# EAGLE board OOBD-Tiger_4L_18µmbeta (EAGLE 7.6.0)
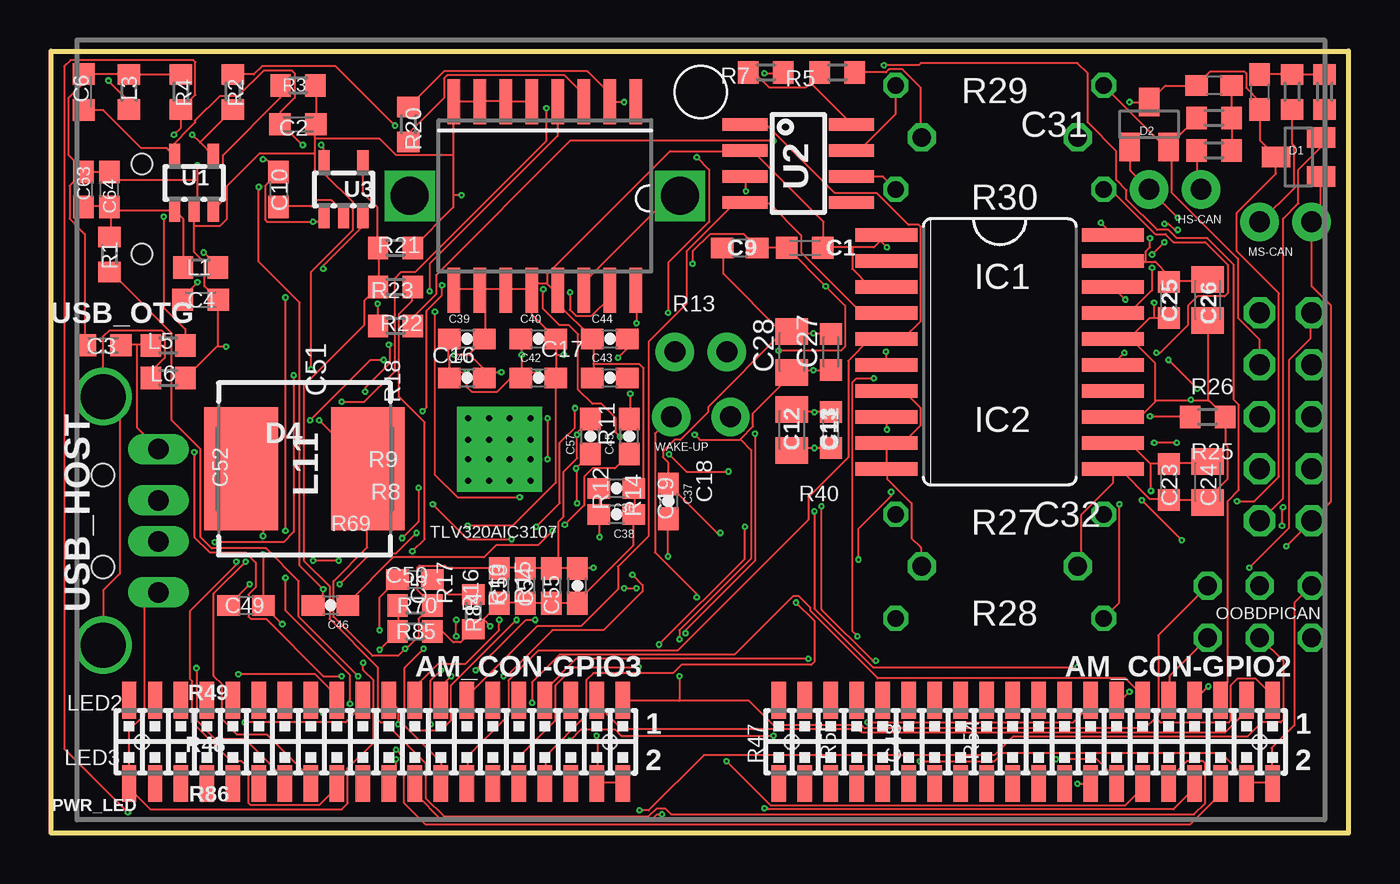
[diagram p0: board, top side]
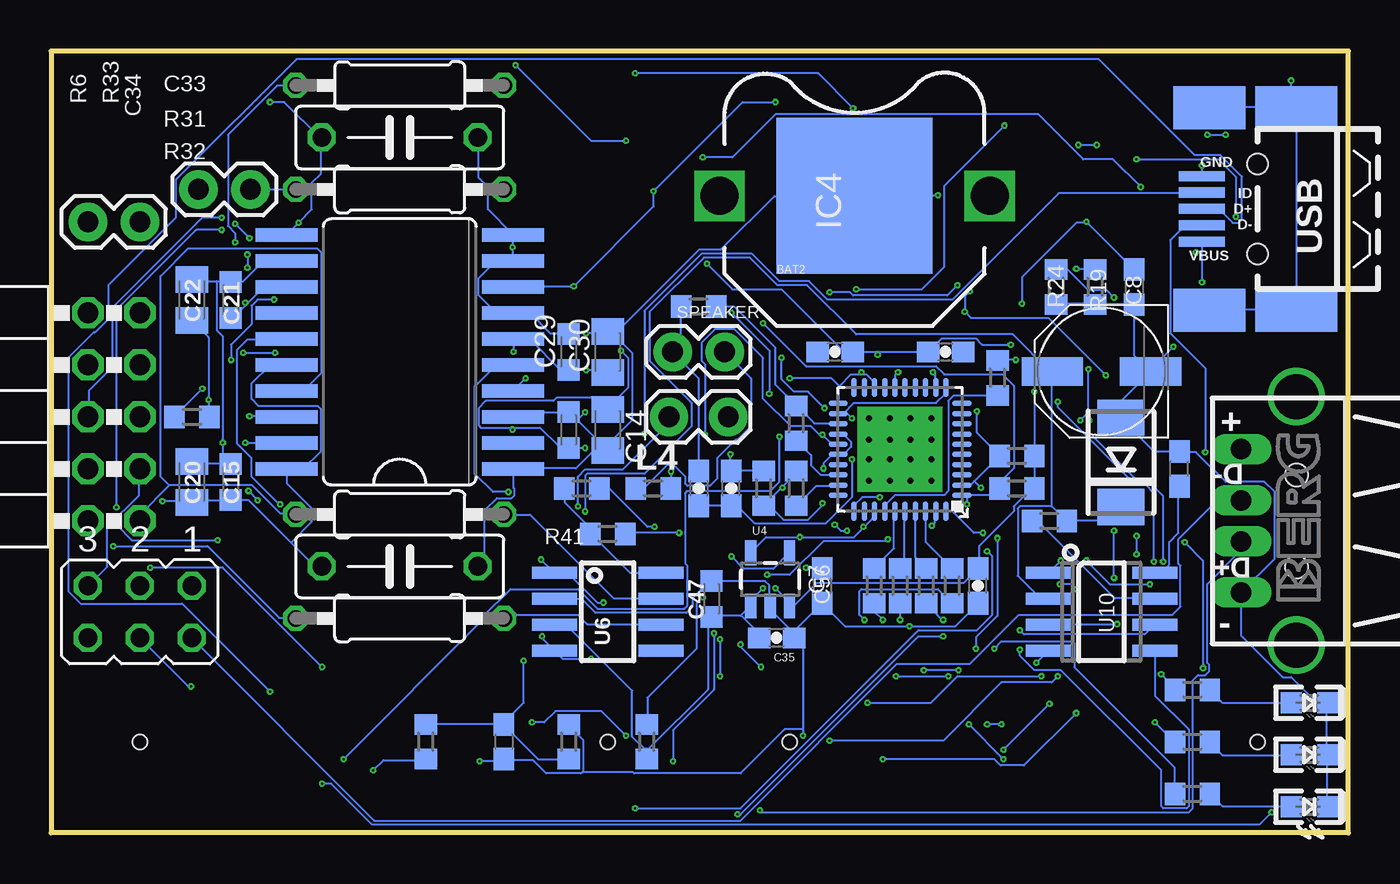
[diagram p1: board, bottom side, seen from below]

Size 63.39 x 38.18 mm. Coordinates in mm from the lower left corner, seen from the top.
Outline: 0,0 63.39,0 63.39,38.18 0,38.18 0,0
Copper layers (1+2*3+16): Top 0.018mm / dielectric 0.36mm / Route2 0.018mm / dielectric 0.71mm / Route3 0.018mm / dielectric 0.36mm / Bottom 0.018mm
Design rules "Multi-CB_4L_100um-Tracks_OL35um-IL18um": minimum track width 0.1mm, minimum drill 0.1mm, track to track 0.1mm, track to pad 0.1mm, pad to pad 0.1mm, via to via 0.1mm, smd to smd 0mil, copper to edge 0.2mm, drill to drill 0.2mm, minimum pad ring 0.1mm, minimum via ring 0.1mm, stop-mask expansion 2mil, vias tented up to drill 0.45mm, thermal gap 0.2mm
Net classes: 2 lan_sh: clearance 0.762 mm
tRestrict: area 42.3,10.5 to 50.5,37.3
bRestrict: area 42.4,10.5 to 50.4,37.4

## Footprints (pad centres in the part's own frame; a part is rotated, then mirrored left to right if it is on the bottom)
OOBD-TIGER-AM3352-SOM = smd 0.7 x 1.8: 3-1 27.94,-13.208; 3-2 27.94,-17.272; 3-3 26.67,-13.208; 3-4 26.67,-17.272; 3-5 25.4,-13.208; 3-6 25.4,-17.272; 3-7 24.13,-13.208; 3-8 24.13,-17.272; 3-9 22.86,-13.208; 3-10 22.86,-17.272; 3-11 21.59,-13.208; 3-12 21.59,-17.272; 3-13 20.32,-13.208; 3-14 20.32,-17.272; 3-15 19.05,-13.208; 3-16 19.05,-17.272; 3-17 17.78,-13.208; 3-18 17.78,-17.272; 3-19 16.51,-13.208; 3-20 16.51,-17.272; 3-21 15.24,-13.208; 3-22 15.24,-17.272; 3-23 13.97,-13.208; 3-24 13.97,-17.272; 3-25 12.7,-13.208; 3-26 12.7,-17.272; 3-27 11.43,-13.208; 3-28 11.43,-17.272; 3-29 10.16,-13.208; 3-30 10.16,-17.272; 3-31 8.89,-13.208; 3-32 8.89,-17.272; 3-33 7.62,-13.208; 3-34 7.62,-17.272; 3-35 6.35,-13.208; 3-36 6.35,-17.272; 3-37 5.08,-13.208; 3-38 5.08,-17.272; 3-39 3.81,-13.208; 3-40 3.81,-17.272; 4-1 -3.81,-13.208; 4-2 -3.81,-17.272; 4-3 -5.08,-13.208; 4-4 -5.08,-17.272; 4-5 -6.35,-13.208; 4-6 -6.35,-17.272; 4-7 -7.62,-13.208; 4-8 -7.62,-17.272; 4-9 -8.89,-13.208; 4-10 -8.89,-17.272; 4-11 -10.16,-13.208; 4-12 -10.16,-17.272; 4-13 -11.43,-13.208; 4-14 -11.43,-17.272; 4-15 -12.7,-13.208; 4-16 -12.7,-17.272; 4-17 -13.97,-13.208; 4-18 -13.97,-17.272; 4-19 -15.24,-13.208; 4-20 -15.24,-17.272; 4-21 -16.51,-13.208; 4-22 -16.51,-17.272; 4-23 -17.78,-13.208; 4-24 -17.78,-17.272; 4-25 -19.05,-13.208; 4-26 -19.05,-17.272; 4-27 -20.32,-13.208; 4-28 -20.32,-17.272; 4-29 -21.59,-13.208; 4-30 -21.59,-17.272; 4-31 -22.86,-13.208; 4-32 -22.86,-17.272; 4-33 -24.13,-13.208; 4-34 -24.13,-17.272; 4-35 -25.4,-13.208; 4-36 -25.4,-17.272; 4-37 -26.67,-13.208; 4-38 -26.67,-17.272; 4-39 -27.94,-13.208; 4-40 -27.94,-17.272 | hole 0.7: 27.305,-15.24; 4.445,-15.24; -4.445,-15.24; -27.305,-15.24
BATTCON_12MM_PTH = smd 7.62 x 7.62: GND 0,0 | drill 1.854 square: VCC@1 -6.604,0; VCC@2 6.604,0
C0603K = smd 1.05 x 1.08: 1 -0.875,0; 2 0.875,0
0603-CAP = smd 1.1 x 1: 1 -0.85,0; 2 0.85,0
C0603 = smd 1.1 x 1: 1 -0.85,0; 2 0.85,0
C0805K = smd 1.3 x 1.6: 1 -1,0; 2 1,0
C075-032X103 = drill 0.914 octagon: 1 -3.81,0; 2 3.81,0
PANASONIC_D = smd 3 x 1.4: + 2.4,0; - -2.4,0
SOT23 = smd 1 x 1.4: 1 -0.95,-1.1; 2 0.95,-1.1; 3 0,1.1
DO214AA = smd 1.778 x 2.286: A 2.177,0; C -2.177,0
1X02 = drill 1.016 pad 1.88: 1 0,0; 2 2.54,0
SO20W = smd 0.66 x 3.032: 1 -5.715,-5.529; 2 -4.445,-5.529; 3 -3.175,-5.529; 4 -1.905,-5.529; 5 -0.635,-5.529; 6 0.635,-5.529; 7 1.905,-5.529; 8 3.175,-5.529; 9 4.445,-5.529; 10 5.715,-5.529; 11 5.715,5.529; 12 4.445,5.529; 13 3.175,5.529; 14 1.905,5.529; 15 0.635,5.529; 16 -0.635,5.529; 17 -1.905,5.529; 18 -3.175,5.529; 19 -4.445,5.529; 20 -5.715,5.529
SOIC-16W = smd 0.6 x 2.2: 1 -4.445,-4.6; 2 -3.175,-4.6; 3 -1.905,-4.6; 4 -0.635,-4.6; 5 0.635,-4.6; 6 1.905,-4.6; 7 3.175,-4.6; 8 4.445,-4.6; 9 4.445,4.6; 10 3.175,4.6; 11 1.905,4.6; 12 0.635,4.6; 13 -0.635,4.6; 14 -1.905,4.6; 15 -3.175,4.6; 16 -4.445,4.6
L0603 = smd 1 x 1.1: 1 -0.85,0; 2 0.85,0
8X8MM_3131 = smd 3.6 x 6: 1 -3.1,0; 2 3.1,0
LED_0603 = smd 1.016 x 1.016: A 0.889,0; C -0.889,0
2X05/90 = drill 1.016 octagon: 1 -5.08,-6.35; 2 -5.08,-3.81; 3 -2.54,-6.35; 4 -2.54,-3.81; 5 0,-6.35; 6 0,-3.81; 7 2.54,-6.35; 8 2.54,-3.81; 9 5.08,-6.35; 10 5.08,-3.81
JP3Q = drill 0.914 octagon: 1 -2.54,-1.27; 2 -2.54,1.27; 3 0,-1.27; 4 0,1.27; 5 2.54,-1.27; 6 2.54,1.27
LED-0603 = smd 1.016 x 1.016: A 0.889,0; C -0.889,0
R0603 = smd 1 x 1.1: 1 -0.85,0; 2 0.85,0
0207/10 = drill 0.813 octagon: 1 -5.08,0; 2 5.08,0
QFN40-6X6 = smd 0.95 x 0.28: 1 -3.025,2.25; 2 -3.025,1.75; 3 -3.025,1.25; 4 -3.025,0.75; 5 -3.025,0.25; 6 -3.025,-0.25; 7 -3.025,-0.75; 8 -3.025,-1.25; 9 -3.025,-1.75; 10 -3.025,-2.25; 21 3.025,-2.25; 22 3.025,-1.75; 23 3.025,-1.25; 24 3.025,-0.75; 25 3.025,-0.25; 26 3.025,0.25; 27 3.025,0.75; 28 3.025,1.25; 29 3.025,1.75; 30 3.025,2.25 | smd 0.28 x 0.95: 11 -2.25,-3.025; 12 -1.75,-3.025; 13 -1.25,-3.025; 14 -0.75,-3.025; 15 -0.25,-3.025; 16 0.25,-3.025; 17 0.75,-3.025; 18 1.25,-3.025; 19 1.75,-3.025; 20 2.25,-3.025; 31 2.25,3.025; 32 1.75,3.025; 33 1.25,3.025; 34 0.75,3.025; 35 0.25,3.025; 36 -0.25,3.025; 37 -0.75,3.025; 38 -1.25,3.025; 39 -1.75,3.025; 40 -2.25,3.025 | drill 0.3 pad 1.1 square: EP@1 -1.525,1.525; EP@2 -0.5,1.525; EP@3 0.5,1.525; EP@4 1.525,1.525; EP@5 -1.525,0.475; EP@6 -0.5,0.475; EP@7 0.5,0.475; EP@8 1.525,0.475; EP@9 -1.525,-0.475; EP@10 -0.5,-0.475; EP@11 0.5,-0.475; EP@12 1.525,-0.475; EP@13 -1.525,-1.525; EP@14 -0.5,-1.525; EP@15 0.5,-1.525; EP@16 1.525,-1.525
SOT23-5 = smd 1.2 x 0.55: 1 1.3,-0.95; 2 1.3,0; 3 1.3,0.95; 4 -1.3,0.95; 5 -1.3,-0.95
SO-08 = smd 0.6 x 2.2: 1 -1.905,-2.6; 2 -0.635,-2.6; 3 0.635,-2.6; 4 1.905,-2.6; 5 1.905,2.6; 6 0.635,2.6; 7 -0.635,2.6; 8 -1.905,2.6
SOT23-5' = smd 0.55 x 1.2: 1 -0.95,-1.3; 2 0,-1.3; 3 0.95,-1.3; 4 0.95,1.3; 5 -0.95,1.3
SOIC8 = smd 0.6 x 2.2: 1 -1.905,-2.6; 2 -0.635,-2.6; 3 0.635,-2.6; 4 1.905,-2.6; 5 1.905,2.6; 6 0.635,2.6; 7 -0.635,2.6; 8 -1.905,2.6
USB_PN87520_DEV_PTH = drill 1 long: 1 3.5,2.71; 2 1,2.71; 3 -1,2.71; 4 -3.5,2.71 | drill 2.2: P$1 6.07,0; P$2 -6.07,0 | hole 1.1: -2.25,0; 2.25,0
USB_MINI_9PIN = smd 2.25 x 0.5: D+ 2.706,0; D- 2.706,0.8; GND 2.706,-1.6; ID 2.706,-0.8; VBUS 2.706,1.6 | smd 4 x 2.1: GND1 -1.9,4.95; GND3 -1.9,-4.95 | smd 3.5 x 2.1: GND2 2.35,4.95; GND4 2.35,-4.95 | hole 1: 0,2.2; 0,-2.2
1X02_LOCK = drill 1.016 pad 1.88: 1 -0.178,0; 2 2.718,0

## Placement (x,y rotation side)
AM3352-SOM-EVB-PLATFORM  4XGPH127SMT-02X20(PA-V16X-2X20-LF)  [OOBD-TIGER-AM3352-SOM]  31.75,19.68 0 top
BAT2  3,6V  [BATTCON_12MM_PTH]  24.13,31.11 0 bottom
C1  100nF  [C0603K]  36.83,28.57 0 top
C2  100nF  [C0603K]  12.06,34.61 0 top
C3  100nF  [C0603K]  2.54,23.81 180 top
C4  100nF  [C0603K]  7.3,26.04 0 top
C5  0.1µF  [0603-CAP]  18.1,12.06 90 bottom
C6  100nF  [C0603K]  1.59,36.2 90 top
C7  22µF  [0603-CAP]  25.72,12.06 90 top
C8  22uF/6.3V  [C0603]  10.48,26.67 270 bottom
C9  1uF  [C0603]  33.66,28.57 0 top
C10  22uF/6.3V  [C0603]  11.11,31.43 270 top
C11  100nF  [C0603K]  38.1,19.68 90 top
C12  10µF  [C0805K]  36.2,19.68 90 top
C13  100nF  [C0603K]  38.1,19.68 90 bottom
C14  10µF  [C0805K]  36.2,19.68 270 bottom
C15  100nF  [C0603K]  54.61,17.14 270 bottom
C16  0.1µF  [0603-CAP]  19.68,23.5 0 bottom
C17  10µF  [0603-CAP]  25.08,23.5 180 bottom
C18  0,01µF  [0603-CAP]  31.75,16.83 270 bottom
C19  0,01µF  [0603-CAP]  30.16,16.83 90 bottom
C20  10µF  [C0805K]  56.52,17.14 270 bottom
C21  100nF  [C0603K]  54.61,26.04 270 bottom
C22  10µF  [C0805K]  56.52,26.04 270 bottom
C23  100nF  [C0603K]  54.61,17.14 270 top
C24  10µF  [C0805K]  56.52,17.14 270 top
C25  100nF  [C0603K]  54.61,26.04 270 top
C26  10µF  [C0805K]  56.52,26.04 270 top
C27  100nF  [C0603K]  38.1,23.5 90 top
C28  10µF  [C0805K]  36.2,23.5 90 top
C29  100nF  [C0603K]  38.1,23.5 90 bottom
C30  10µF  [C0805K]  36.2,23.5 90 bottom
C31  NA (AY2221K29Y5SS63L7)  [C075-032X103]  46.35,33.97 0 bottom
C32  NA (AY2221K29Y5SS63L7)  [C075-032X103]  46.35,13.02 0 bottom
C33  NA(10nF)  [C0603]  56.83,36.51 180 top
C34  NA(10nF)  [C0603]  59.05,36.2 270 top
C35  1µf  [0603-CAP]  27.94,9.53 180 bottom
C36  2.2µf  [0603-CAP]  27.62,16.83 180 top
C37  NA (47pF)  [0603-CAP]  30.16,16.19 270 top
C38  1.0µF  [0603-CAP]  27.62,15.56 180 top
C39  0.1µF  [0603-CAP]  20.32,24.13 0 top
C40  10µF  [0603-CAP]  23.81,24.13 0 top
C41  0.1µF  [0603-CAP]  20.32,22.23 0 top
C42  10µF  [0603-CAP]  23.81,22.23 0 top
C43  10µF  [0603-CAP]  27.3,22.23 0 top
C44  1.0µF  [0603-CAP]  27.3,24.13 0 top
C45  0.1µF  [0603-CAP]  28.26,19.37 90 top
C46  10µF  [0603-CAP]  13.65,11.11 180 top
C47  100nF  [C0603K]  31.11,11.43 90 bottom
C48  100nF  [C0603]  41.27,4.45 270 bottom
C49  10nF  [C0603]  9.53,11.11 0 top
C50  3.3nF  [C0603]  17.78,12.38 0 top
C51  470uF/25V/LOWESR/105C  [PANASONIC_D]  12.06,22.54 180 bottom
C52  100nF  [C0603]  8.26,17.78 90 bottom
C53  22uF/6.3V  [C0603]  21.91,12.06 270 top
C54  22uF/6.3V  [C0603]  23.18,12.06 270 top
C55  22uF/6.3V  [C0603]  24.45,12.06 270 top
C56  22uF/6.3V  [C0603]  25.72,12.06 270 bottom
C57  0.1µF  [0603-CAP]  26.35,19.37 90 top
C63  22uF/6.3V  [C0603]  1.59,31.43 90 top
C64  22uF/6.3V  [C0603]  2.86,31.43 90 top
D1  PESD1CAN  [SOT23]  60.96,33.02 90 top
D2  PESD1CAN  [SOT23]  53.66,34.61 0 top
D4  SMBJ16A  [DO214AA]  11.11,18.1 90 bottom
HS-CAN  OPEN  [1X02]  56.2,31.43 0 bottom
IC1  ADM3053M  [SO20W]  46.35,23.5 270 top
IC2  ADM3053M  [SO20W]  46.35,23.5 90 bottom
IC4  DS3231  [SOIC-16W]  24.13,31.11 180 top
L1  FB0805/600R/2A  [L0603]  7.3,27.62 180 top
L3  FB0805/600R/200mA(201209-601)  [L0603]  3.81,36.2 270 top
L4  FB0805/600R/2A  [L0603]  33.97,16.83 0 bottom
L5  FB0805/600R/2A  [L0603]  5.71,23.81 180 top
L6  FB0805/600R/2A  [L0603]  5.71,22.23 180 top
L11  10uH/3.15A/20%  [8X8MM_3131]  12.38,17.78 0 top
LED2  LED/Red/0603  [LED_0603]  1.91,6.35 180 bottom
LED3  LED/Yellow/0603  [LED_0603]  1.91,3.81 180 bottom
MS-CAN  OPEN  [1X02]  59.05,29.84 180 bottom
OOBD2-CONNECTOR  In-Car Diagnostic  [2X05/90]  65.41,20.32 90 bottom
OOBDPICAN  Bridge to PICAN  [JP3Q]  59.05,10.79 180 bottom
PWR_LED  LED/Red/0603  [LED-0603]  1.91,1.27 180 bottom
R1  2.2k/1%  [R0603]  2.86,28.26 90 top
R2  NA  [R0603]  8.89,36.2 90 top
R3  13k/1%  [R0603]  12.06,36.51 180 top
R4  10k  [R0603]  6.35,36.2 270 top
R5  10k  [R0603]  38.42,37.15 0 top
R6  60R  [R0603]  62.23,36.2 270 top
R7  NA  [R0603]  34.92,37.15 0 top
R8  10K  [R0603]  16.19,16.83 0 bottom
R9  10K  [R0603]  16.19,18.41 0 bottom
R10  0  [R0603]  21.91,12.06 90 bottom
R11  0  [R0603]  26.99,20 90 bottom
R12  0  [R0603]  26.99,16.83 90 bottom
R13  0  [R0603]  31.75,25.72 180 bottom
R14  0  [R0603]  28.57,16.83 90 bottom
R15  0  [R0603]  23.18,12.06 90 bottom
R16  0  [R0603]  20.64,12.06 90 bottom
R17  0  [R0603]  19.37,12.06 90 bottom
R18  0  [R0603]  17.14,22.23 270 bottom
R19  6k8k/1%  [R0603]  12.38,26.67 90 bottom
R20  10k  [R0603]  17.46,34.61 90 top
R21  10k  [R0603]  16.83,28.57 180 top
R22  2.2k/1%  [R0603]  16.83,24.77 180 top
R23  NA  [R0603]  16.83,26.67 0 top
R24  10k/1%  [R0603]  14.29,26.67 90 bottom
R25  8k2  [R0603]  56.52,20.32 180 top
R26  8k2  [R0603]  56.52,20.32 180 bottom
R27  0R  [0207/10]  46.35,15.56 0 bottom
R28  0R  [0207/10]  46.35,10.48 0 bottom
R29  0R  [0207/10]  46.35,36.51 180 bottom
R30  0R  [0207/10]  46.35,31.43 0 bottom
R31  60R  [R0603]  56.83,34.92 180 top
R32  60R  [R0603]  56.83,33.34 180 top
R33  60R  [R0603]  60.64,36.2 270 top
R40  NA  [R0603]  37.47,16.83 0 bottom
R41  10k  [R0603]  36.2,14.61 0 bottom
R47  2.2k/1%  [R0603]  34.29,4.45 270 bottom
R48  2.2k/1%  [R0603]  7.62,4.45 0 bottom
R49  2.2k/1%  [R0603]  7.62,6.99 0 bottom
R54  49.9R/1%  [R0603]  45.09,4.45 90 bottom
R55  NA  [R0603]  38.1,4.45 90 bottom
R69  10k  [R0603]  14.61,15.24 180 bottom
R70  4.99k/1%  [R0603]  17.78,11.11 0 top
R84  2.2k/1%  [R0603]  20.64,10.79 270 top
R85  1.05k/1%  [R0603]  17.78,9.84 0 top
R86  2.2k/1%  [R0603]  7.62,1.91 0 bottom
SPEAKER  LS1  [1X02]  30.48,23.5 180 bottom
TLV320AIC3107  Audio-Amplifier  [QFN40-6X6]  21.91,18.73 180 bottom
U1  SY6280  [SOT23-5]  6.99,31.75 270 top
U2  SN65HVD230(SO8)  [SO-08]  36.51,32.7 270 top
U3  SY6280  [SOT23-5]  14.29,31.43 270 top
U4  TLV70215  [SOT23-5']  28.26,12.38 0 bottom
U6  SN65HVD230(SO8)  [SO-08]  36.2,10.79 270 bottom
U10  MP1482DS  [SOIC8]  12.06,10.79 270 bottom
USB_HOST  USB_A_VERTICAL  [USB_PN87520_DEV_PTH]  2.54,15.24 90 bottom
USB_OTG  USB-OTG  [USB_MINI_9PIN]  4.45,30.48 180 bottom
WAKE-UP  Open  [1X02_LOCK]  30.48,20.32 180 bottom

## Library data of the parts
AM3352-SOM-EVB-PLATFORM = OOBDtiger-Connector
BAT2 HS-CAN MS-CAN SPEAKER WAKE-UP = SparkFun
C1-C4 C6 C8-C15 C20-C32 C47-C50 C52-C56 C63 C64 L1 L3-L6 R1-R5 R7 R19-R30 R40 R41 R47-R49 R54 R55 R69 R70 R84-R86 = rcl
C5 C7 C18 C19 C37 C38 C43-C46 C57 = SparkFun-Passives; MANEX: 123-0001115
C16 C17 C35 C36 C39-C42 = SparkFun-Passives; MANEX: 123-0001032
C33 C34 R6 R10-R18 R31-R33 = resistor
C51 = SparkFun-Capacitors; PROD_ID: CAP-10547
D1 D2 = Industrialberry
D4 L11 = OLIMEX_DISCRET
IC1 IC2 = ADM3053
IC4 = DS3231_industrialberry
LED2 LED3 PWR_LED = DOUBLE-SIDE
OOBD2-CONNECTOR = pinhead
OOBDPICAN = jumper
R8 R9 = resistor; MANEX: 110-0002014
TLV320AIC3107 = TLV320AIC3107
U1 U3 U10 = OLIMEX_IC
U2 U6 = arm
U4 = SparkFun-PowerIC
USB_HOST USB_OTG = OLIMEX_CONNECTORS

## Nets
3V3 [PWR]: AM3352-SOM-EVB-PLATFORM.3-3 AM3352-SOM-EVB-PLATFORM.4-3
+3V3: C1.1 C5.2 C9.2 C11.1 C12.1 C13.1 C14.1 C16.1 C17.1 C35.2 C39.1 C40.1 C41.1 C42.1 C43.2 C47.1 IC1.8 IC2.8 IC4.2 R8.2 R9.2 R20.2 R47.2 TLV320AIC3107.12 TLV320AIC3107.13 TLV320AIC3107.18 TLV320AIC3107.21 U2.3 U4.1 U4.3 U6.3
+5V: AM3352-SOM-EVB-PLATFORM.3-1 AM3352-SOM-EVB-PLATFORM.4-1 C2.1 C6.1 C7.2 C27.1 C28.1 C29.1 C30.1 C53.1 C54.1 C55.1 C56.1 C57.2 IC1.6 IC2.6 L11.2 OOBDPICAN.1 R70.2 R86.1 TLV320AIC3107.25 U1.5 U3.5
+5V_OTG_PWR: C4.1 L1.1 USB_OTG.VBUS
+12V: C51.+ D4.C OOBD2-CONNECTOR.10 R69.1 U10.2
AGND: C18.2 C19.1 TLV320AIC3107.11 TLV320AIC3107.22
AUD_BCLK: AM3352-SOM-EVB-PLATFORM.4-19 R15.1
AUD_DIN: AM3352-SOM-EVB-PLATFORM.4-18 R16.1
AUD_DOUT: AM3352-SOM-EVB-PLATFORM.4-20 R17.1
AUD_MCLK: AM3352-SOM-EVB-PLATFORM.4-24 R18.1
AUD_WCLK: AM3352-SOM-EVB-PLATFORM.4-17 R10.1
CAN0_H: D1.2 IC2.17 OOBD2-CONNECTOR.1 R6.2 R27.1
CAN0_L: D1.1 IC2.15 MS-CAN.2 OOBD2-CONNECTOR.2 R28.1
CAN1_H: D2.2 IC1.17 OOBD2-CONNECTOR.7 R29.2 R31.2
CAN1_L: D2.1 HS-CAN.2 IC1.15 OOBD2-CONNECTOR.6 R30.1
DCAN0_RX: AM3352-SOM-EVB-PLATFORM.4-7 IC2.4 U6.4
DCAN0_TX: AM3352-SOM-EVB-PLATFORM.4-8 IC2.5 U6.1
DCAN1_RX: AM3352-SOM-EVB-PLATFORM.4-13 IC1.4 U2.4
DCAN1_TX: AM3352-SOM-EVB-PLATFORM.4-14 IC1.5 U2.1
DVDD: C36.2 C38.2 C44.2 TLV320AIC3107.33 U4.5
EXT_WAKEUP: AM3352-SOM-EVB-PLATFORM.3-20 R54.1
GND [PWR]: AM3352-SOM-EVB-PLATFORM.3-2 AM3352-SOM-EVB-PLATFORM.3-4 AM3352-SOM-EVB-PLATFORM.4-2 AM3352-SOM-EVB-PLATFORM.4-4 AM3352-SOM-EVB-PLATFORM.4-40 BAT2.GND C1.2 C2.2 C3.2 C4.2 C5.1 C6.2 C7.1 C8.2 C9.1 C10.2 C11.2 C12.2 C13.2 C14.2 C16.2 C17.2 C27.2 C28.2 C29.2 C30.2 C31.2 C32.2 C35.1 C36.1 C37.1 C38.1 C39.2 C40.2 C41.2 C42.2 C43.1 C44.1 C47.2 C48.2 C51.- C52.2 C53.2 C54.2 C55.2 C56.2 C57.1 C63.2 C64.2 D4.A IC1.1 IC1.3 IC1.7 IC1.9 IC1.10 IC2.1 IC2.3 IC2.7 IC2.9 IC2.10 IC4.5 IC4.6 IC4.7 IC4.8 IC4.9 IC4.10 IC4.11 IC4.12 IC4.13 L3.1 L6.1 LED2.C LED3.C OOBD2-CONNECTOR.3 OOBDPICAN.5 PWR_LED.C R3.1 R4.1 R5.2 R12.2 R14.1 R19.1 R21.1 R24.1 R41.2 R55.2 R84.2 R85.2 TLV320AIC3107.16 TLV320AIC3107.24 TLV320AIC3107.26 TLV320AIC3107.39 U1.2 U2.2 U3.2 U4.2 U6.2 U10.4 USB_HOST.4 USB_OTG.GND
GND1 [PWR]: C45.1 C46.1
GNDA [PWR]: C15.2 C20.2 C21.2 C22.2 C23.2 C24.2 C25.2 C26.2 C31.1 C32.1 C33.2 C34.2 D1.3 D2.3 IC1.11 IC1.13 IC1.16 IC1.20 IC2.11 IC2.13 IC2.16 IC2.20 R25.1 R26.1
HS-CAN_RS: AM3352-SOM-EVB-PLATFORM.4-26 R7.2
I2C0-SCL: AM3352-SOM-EVB-PLATFORM.4-15 IC4.16 R8.1 TLV320AIC3107.1
I2C0-SDA: AM3352-SOM-EVB-PLATFORM.4-16 IC4.15 R9.1 TLV320AIC3107.2
LED1: AM3352-SOM-EVB-PLATFORM.4-21 R48.1
LED2: AM3352-SOM-EVB-PLATFORM.4-23 R49.1
MS-CAN_RS: AM3352-SOM-EVB-PLATFORM.4-25 R40.2
N$1: LED2.A R49.2
N$2: C33.1 R31.1 R32.1
N$3: R19.2 U3.3
N$4: C52.1 U10.8
N$5: R5.1 R7.1 U2.8
N$6: R69.2 U10.7
N$7: C49.1 U10.1
N$8: C49.2 L11.1 U10.3
N$9: C50.1 U10.6
N$10: C34.1 R6.1 R33.1
N$11: C50.2 R84.1
N$12: C37.2 U4.4
N$13: C8.1 C10.1 L5.1 R22.2 U3.1
N$14: C19.2 L4.2 R14.2
N$15: C18.1 R13.2 SPEAKER.2
N$16: L4.1 SPEAKER.1
N$18: R11.2 R13.1 TLV320AIC3107.23
N$19: R11.1 TLV320AIC3107.28
N$20: R12.1 TLV320AIC3107.29
N$21: C45.2 C46.2 TLV320AIC3107.40
N$22: R17.2 TLV320AIC3107.38
N$23: R16.2 TLV320AIC3107.37
N$24: R15.2 TLV320AIC3107.35
N$25: R10.2 TLV320AIC3107.36
N$26: R18.2 TLV320AIC3107.34
N$27: IC4.3 R20.1
N$28: C3.1 L5.2 USB_HOST.1
N$29: L6.2 USB_HOST.P$1 USB_HOST.P$2
N$30: HS-CAN.1 R32.2
N$31: C23.1 C24.1 C25.1 C26.1 IC1.12 IC1.19
N$32: MS-CAN.1 R33.2
N$33: IC2.18 R25.2
N$40: R27.2 U6.7
N$41: R30.2 U2.6
N$42: R28.2 U6.6
N$43: R47.1 WAKE-UP.1
N$44: C48.1 R54.2 R55.1 WAKE-UP.2
N$45: R29.1 U2.7
N$50: C15.1 C20.1 C21.1 C22.1 IC2.12 IC2.19
N$52: IC1.18 R26.2
N$62: R70.1 R85.1 U10.5
N$80: R40.1 R41.1 U6.8
N$99: R3.2 U1.3
N$100: C63.1 C64.1 L1.2 R1.2 U1.1
N$129: PWR_LED.A R86.2
N$231: LED3.A R48.2
N$266: L3.2 USB_OTG.GND1 USB_OTG.GND2 USB_OTG.GND3 USB_OTG.GND4
SYS_RESETN: AM3352-SOM-EVB-PLATFORM.4-28 IC4.4 TLV320AIC3107.31
USB0_CE: AM3352-SOM-EVB-PLATFORM.3-14 R2.2
USB0_DM: AM3352-SOM-EVB-PLATFORM.3-15 USB_OTG.D-
USB0_DP: AM3352-SOM-EVB-PLATFORM.3-13 USB_OTG.D+
USB0_DRV: AM3352-SOM-EVB-PLATFORM.3-16 R2.1 R4.2 U1.4
USB0_ID: AM3352-SOM-EVB-PLATFORM.3-12 USB_OTG.ID
USB0_VBUS: AM3352-SOM-EVB-PLATFORM.3-11 R1.1
USB1_CE: AM3352-SOM-EVB-PLATFORM.3-8 R23.2
USB1_DM: AM3352-SOM-EVB-PLATFORM.3-9 OOBDPICAN.2 USB_HOST.2
USB1_DP: AM3352-SOM-EVB-PLATFORM.3-7 OOBDPICAN.4 USB_HOST.3
USB1_DRV: AM3352-SOM-EVB-PLATFORM.3-10 R21.2 R23.1 U3.4
USB1_ID: AM3352-SOM-EVB-PLATFORM.3-6 R24.2
USB1_VBUS: AM3352-SOM-EVB-PLATFORM.3-5 R22.1
VBAT: BAT2.VCC@1 IC4.14

## Tracks (layer width: path | path; a pad name or v marks a point on that pad's centre or on a via)
3V3
  Top 0.1: AM3352-SOM-EVB-PLATFORM.4-3 26.7,6.45 26.7,6.25 27.9,5.05 39.5,5.05 39.65,4.9 57.35,4.9 58.4,5.95 58.4,6.45 AM3352-SOM-EVB-PLATFORM.3-3
+3V3  (via drill 0.1)
  Top 0.1: v28,11.95 v28.6,11.95 | R20.2 17.5,35.5 19.2,37.2 26.2,37.2 27.3,36.1 27.3,35.75 IC4.2 27.35,35.7 v28,35.7 | v27.3,22.2 28.15,22.2 C43.2 | 23,22.5 v23,23.35 23,24.1 C40.1 | 23,22.5 23,22.25 C42.1 | 19.45,22.5 19.45,23.15 19.4,23.2 19.4,24.05 19.45,24.1 C39.1 | 19.45,22.5 19.45,22.25 C41.1 19.45,22.5 | 19.45,22.5 v20.3,22.5 20.3,21.8 20.55,21.55 21.8,21.55 22.45,22.2 22.95,22.2 C42.1 | 23,22.5 v23.8,22.5 | 23,22.5 C42.1 | C13.1 v37.3,18.8 36.3,18.8 36.2,18.7 C12.1 | v40.85,19.7 40.85,20.3 IC1.8 | v33.95,31.35 33.95,32.05 U2.3 | v35.55,23.55 38.6,23.55 38.8,23.75 38.8,25.75 v37.85,26.7 36,28.55 C1.1 35.95,28.6 34.55,28.6 C9.2 34.5,28.6 33.85,29.25 32.2,29.25 31.35,28.4 v31.35,27.8 | v15.35,21.55 15.35,21.75 16.55,22.95 16.55,23.8 v16.5,23.85
  Bottom 0.1: 29.68,10.62 29.25,11.05 U4.1 29.2,11.1 29.2,11.35 v28.6,11.95 | 29.68,10.62 29.7,10.6 31.1,10.6 C47.1 31.15,10.55 31.3,10.4 31.3,7 34.23,4.08 | 34.23,4.08 34.25,4.05 34.25,3.6 R47.2 | 29.68,10.62 28.8,9.75 28.8,9.55 C35.2 | U6.3 38.75,10.15 38.2,10.15 35,6.95 35,4.7 34.4,4.1 34.25,4.1 34.23,4.08 | v28,11.95 27.3,11.25 27.3,11.15 U4.3 27.3,11.1 27.1,11.1 26,12.2 18.8,12.2 C5.2 18.05,12.95 18.05,14 16.35,15.7 16.35,15.95 15.45,16.85 15.4,16.85 R8.2 15.35,16.85 R9.2 15.35,18.45 v15.35,21.55 | 23.8,22.4 24.3,22.4 24.88,21.82 | 23.8,22.4 23.55,22.4 23.2,22.05 23.2,21.8 TLV320AIC3107.18 | 24.88,21.82 24.9,21.8 24.9,21 TLV320AIC3107.21 | v27.3,22.2 25.25,22.2 24.88,21.82 | 23,23.5 24.2,23.5 C17.1 24.25,23.5 24.65,23.5 27.7,26.55 30.1,26.55 v31.35,27.8 | 23,23.5 C16.1 20.5,23.5 19.85,24.15 18.2,24.15 17.9,23.85 v16.5,23.85 | TLV320AIC3107.13 20.2,21.75 TLV320AIC3107.12 20.2,21.8 20.2,22.4 v20.3,22.5 | v23,23.35 23,23.5 | v23.8,22.5 23.8,22.4 | 40.85,19.8 42.4,19.8 42.5,19.9 42.5,20.75 42.15,21.1 38.85,21.1 38.7,21.25 36.75,21.25 36.2,20.7 C14.1 36.2,20.75 35.2,21.75 35.2,23.2 v35.55,23.55 | 40.85,19.8 39.5,19.8 38.55,18.85 38.1,18.85 C13.1 v37.3,18.8 | 40.85,19.8 v40.85,19.7 | IC2.8 40.8,26.7 v37.85,26.7 33.95,30.6 v33.95,31.35 29.6,35.7 v28,35.7
+5V  (via drill 0.1)
  Top 0.1: 30.7,6.45 34.1,6.45 35.3,5.25 39.6,5.25 39.75,5.1 53.45,5.1 53.98,5.62 | 30.7,6.45 27.95,6.45 AM3352-SOM-EVB-PLATFORM.4-1 | 53.98,5.62 54.1,5.75 54.1,9.65 OOBDPICAN.1 | 53.98,5.62 54.2,5.4 57.55,5.4 57.65,5.5 57.65,7.2 58,7.55 58.85,7.55 59.65,6.75 59.65,6.5 AM3352-SOM-EVB-PLATFORM.3-1 | C29.1 38.1,22.6 v37.25,22.6 36.3,22.6 C30.1 36.15,22.45 36.15,22.35 34.3,20.5 34.3,19.85 33.67,19.23 | v40.8,23.5 40.8,22.9 IC1.6 | C57.2 26.35,20.2 25.7,19.55 v25.7,19.45 25.7,18.3 25.05,17.65 25.05,15.45 24.8,15.2 24.8,12.95 | v26.5,12.95 25.75,12.95 C7.2 25.7,12.95 24.8,12.95 | C55.1 24.4,12.95 23.2,12.95 C54.1 23.15,12.95 21.95,12.95 C53.1 21.9,12.95 19.35,12.95 19.25,13.05 18,13.05 17.9,12.95 17.9,11.85 18.6,11.15 R70.2 18.6,11.1 17.95,10.45 17.95,9.6 17.45,9.1 17.4,9.1 v17.3,9 16.95,8.65 15.7,8.65 13.8,10.55 13.8,12.3 15.45,13.95 15.45,17.75 L11.2 15.45,17.8 v13.1,20.15 | 24.8,12.95 24.45,12.95 C55.1 | 24.8,12.95 C55.1 | 33.67,19.23 33.65,19.2 31.7,19.2 v31.45,19.45 | 5.72,33.38 6,33.1 U1.5 | 5.72,33.38 5.65,33.45 4.4,33.45 2.55,35.3 1.6,35.3 C6.1 | 5.72,33.38 7.05,34.7 7.05,34.8 8.25,36 9.15,36 10.4,37.25 11.75,37.25 11.9,37.1 11.9,35.9 11.2,35.2 11.2,34.65 C2.1 11.25,34.65 v12.3,33.6 | v13.2,33.6 13.3,33.5 13.3,32.75 U3.5 13.35,32.7 13.35,32.2 14.75,30.8 14.75,29.45 12.7,27.4 v12.7,22.65 | v30.7,7.65 30.7,6.45 | v30.7,9.45 30.7,9.9 34.2,13.4 34.2,18.7 33.67,19.23
  Bottom 0.1: C30.1 36.3,22.6 v37.25,22.6 38.1,22.6 C29.1 38.1,22.65 38.55,22.65 40,24.1 40.8,24.1 IC2.6 40.8,24.05 v40.8,23.5 | TLV320AIC3107.25 24.95,19 25.25,19 v25.7,19.45 25.85,19.45 26.25,19.85 27.25,19.85 28.6,21.2 28.6,23.2 30,24.6 30.95,24.6 31.6,23.95 31.6,23.05 31.45,22.9 v31.45,19.45 | v26.5,12.95 25.75,12.95 C7.2 | v12.3,33.6 v13.2,33.6 | v17.3,9 16.95,9.35 13.5,9.35 13.4,9.25 13.4,8.1 8.5,3.2 8.5,1.95 R86.1 | v12.7,22.65 12.7,20.55 v13.1,20.15 | v30.7,9.45 v30.7,7.65
+5V_OTG_PWR  (via drill 0.1)
  Top 0.1: v7.15,26.9 6.45,26.2 6.45,26.05 C4.1 | v7.45,28.35 8.15,27.65 L1.1
  Bottom 0.1: 7.15,28.35 7.15,28.85 USB_OTG.VBUS | 7.15,28.35 v7.15,26.9 | 7.15,28.35 v7.45,28.35
+12V  (via drill 0.1)
  Top 0.1: v58.55,12.95 60.5,14.9 60.5,23.1 61.55,24.15 61.55,25.4 OOBD2-CONNECTOR.10 | v50.15,8.1 40.15,8.1 37.3,10.95 v37.3,15.7
  Bottom 0.1: D4.C 11.15,15.9 11.8,15.25 R69.1 13.8,15.25 14.5,15.95 | 14.5,15.95 16.05,15.95 16.15,15.85 16.15,12.55 15.05,11.45 14.7,11.45 U10.2 | 14.5,15.95 14.5,22.5 C51.+ 14.55,22.5 16.4,24.35 24.05,24.35 26.45,26.75 27.9,26.75 29.25,28.1 31.5,28.1 34.15,25.45 34.15,23.05 32.1,21 32.1,19.85 34.4,17.55 37.2,17.55 37.3,17.45 v37.3,15.7 | v58.55,12.95 55,12.95 v50.15,8.1
AGND  (via drill 0.1)
  Top 0.1: v24.25,20.25 v24.25,18.25
  Bottom 0.1: C18.2 31.75,16 30.2,16 C19.1 30.15,15.95 29.85,15.95 29,15.1 25.55,15.1 24.25,16.4 v24.25,18.25 | TLV320AIC3107.11 19.7,21.75 19.7,21.45 20.15,21 24.15,21 24.65,20.5 24.9,20.5 TLV320AIC3107.22 24.55,20.55 v24.25,20.25
AUD_BCLK  (via drill 0.1)
  Top 0.1: v22.75,10.4 19.55,7.2 19.55,5.5 19.05,5 17.95,5 v17.65,5.3 | v16.95,5.3 16.95,6.05 16.55,6.45 AM3352-SOM-EVB-PLATFORM.4-19
  Bottom 0.1: v22.75,10.4 23.15,10.8 23.15,11.2 R15.1 | v16.95,5.3 v17.65,5.3
AUD_DIN  (via drill 0.1)
  Top 0.1: v19.8,9.6 v19.8,10.4 | v29.85,0.9 29.6,0.9 29.3,0.6 19.1,0.6 17.8,1.9 17.8,2.4 AM3352-SOM-EVB-PLATFORM.4-18
  Bottom 0.1: v19.8,10.4 19.85,10.4 20.1,10.65 20.1,10.7 20.6,11.2 R16.1 | v19.8,9.6 21,9.6 29.7,0.9 v29.85,0.9
AUD_DOUT  (via drill 0.1)
  Top 0.1: v23.65,10.4 23.2,10.4 v20.75,7.95 | v19.05,7.95 18.55,7.45 v18.55,5.3 | v16.85,3.6 16.85,2.75 16.55,2.45 AM3352-SOM-EVB-PLATFORM.4-20
  Bottom 0.1: v23.65,10.4 23.9,10.65 23.9,11.8 23.8,11.9 20.05,11.9 19.4,11.25 R17.1 | v19.05,7.95 v20.75,7.95 | v16.85,3.6 v18.55,5.3
AUD_MCLK  (via drill 0.1)
  Top 0.1: v16.25,23.1 15.6,23.1 v12.65,20.15 | v9.05,13.25 9.05,13.1 6.8,10.85 6.8,7.5 6.9,7.4 6.9,5.4 8.8,3.5 9.3,3.5 9.65,3.15 9.65,1.45 9.75,1.35 13.1,1.35 13.95,2.2 13.95,2.4 AM3352-SOM-EVB-PLATFORM.4-24
  Bottom 0.1: v16.25,23.1 17.1,23.1 R18.1 | v12.65,20.15 12.65,19.55 10.3,17.2 9.8,17.2 9.05,16.45 v9.05,13.25
AUD_WCLK  (via drill 0.1)
  Top 0.1: v21.9,10.4 21.9,9.9 20.25,8.25 18.9,8.25 17.8,7.15 17.8,6.5 AM3352-SOM-EVB-PLATFORM.4-17
  Bottom 0.1: v21.9,10.4 R10.1
CAN0_H
  Top 0.1: R6.2 62.2,35.3 62.2,34.1 62.1,34 D1.2 62.05,33.95 62.05,33.5 60.95,32.4 60.95,30.75 60.2,30 60.2,16.35 59.1,15.25 OOBD2-CONNECTOR.1
  Bottom 0.1: 57.62,16.98 59.05,15.55 OOBD2-CONNECTOR.1 | 57.62,16.98 57.6,17 53.6,17 52.2,15.6 51.45,15.6 R27.1 | 57.62,16.98 58.05,17.4 58.05,27.2 56.7,28.55 50.4,28.55 50.2,28.35 50.2,22.45 51.05,21.6 51.85,21.6 IC2.17
CAN0_L  (via drill 0.1)
  Top 0.1: D1.1 62.05,32.05 62.05,30.3 MS-CAN.2 61.6,29.8 61.6,26.7 62.55,25.75 62.55,16.2 OOBD2-CONNECTOR.2 61.55,15.2 v60.35,14 | v52.2,16.05 52.2,11.25 51.45,10.5 R28.1
  Bottom 0.1: v60.35,14 55.75,14 52.25,10.5 51.45,10.5 R28.1 | v52.2,16.05 52.25,16.05 53.6,17.4 53.6,18.3 54.3,19 54.3,23.6 53.8,24.1 51.9,24.1 IC2.15
CAN1_H  (via drill 0.1)
  Top 0.1: R31.2 55.95,34.9 54.6,33.55 D2.2 | D2.2 54.55,33.55 54.4,33.55 51.45,36.5 R29.2 | IC1.17 52.7,25.4 53.8,26.5 v53.8,27.6 | v54.4,28.85 v53.8,28.25 | OOBD2-CONNECTOR.7 59.05,22.9 59.05,24.1 58,25.15 58,28.05 54.75,31.3 54.75,33.4 54.65,33.5 D2.2
  Bottom 0.1: v53.8,28.25 v53.8,27.6 | v54.4,28.85 54.4,29.3 54.75,29.65 54.75,34.1 52.35,36.5 51.45,36.5 R29.2
CAN1_L  (via drill 0.1)
  Top 0.1: D2.1 52.75,33.5 52.75,32.35 53.65,31.45 HS-CAN.2 53.7,31.4 v55.05,30.05 | v52.45,23.45 51.9,22.9 IC1.15 | v54,23.45 54.2,23.45 55.55,24.8 55.55,25.75 56,26.2 57.35,26.2 57.5,26.35 57.5,27.75 56.4,28.85 54.85,28.85 54.45,29.25 53.95,29.25 51.8,31.4 51.45,31.4 R30.1
  Bottom 0.1: R30.1 51.45,31.45 53.65,31.45 HS-CAN.2 | v54,23.45 v52.45,23.45 | v55.05,30.05 56,30.05 60.4,25.65 60.4,22.75 61.55,21.6 61.55,20.35 OOBD2-CONNECTOR.6
DCAN0_RX  (via drill 0.1)
  Top 0.1: v37,8.5 25.65,8.5 24.15,7 24.15,6.5 AM3352-SOM-EVB-PLATFORM.4-7 | v40.2,22.2 39.35,22.2 39.15,22 39.15,9.85 v39.4,9.6
  Bottom 0.1: v37,8.5 38.4,8.5 38.75,8.85 U6.4 39.4,9.5 v39.4,9.6 | v40.2,22.2 40.8,21.6 IC2.4
DCAN0_TX  (via drill 0.1)
  Top 0.1: v36.4,11.25 37.3,10.35 37.3,8.35 37.15,8.2 30.8,8.2 30.4,7.8 26.5,7.8 26.15,7.45 26.15,5.75 24.15,3.75 24.15,2.45 AM3352-SOM-EVB-PLATFORM.4-8 | v41.05,16.65 41.05,16.45 39.45,14.85 v39.45,13.35
  Bottom 0.1: v36.4,11.25 36.7,11.25 38.15,12.7 U6.1 v39.45,13.35 | v41.05,16.65 41.8,16.65 42.7,17.55 42.7,21.8 41.65,22.85 40.85,22.85 IC2.5
DCAN1_RX
  Top 0.1: AM3352-SOM-EVB-PLATFORM.4-13 20.35,6.5 20.35,6.7 23.75,10.1 25.9,10.1 27.7,11.9 27.7,13 29.2,14.5 29.2,24 31.05,25.85 31.05,28.4 33.4,30.75 33.9,30.75 U2.4 33.95,30.75 35.1,30.75 36.65,29.2 36.65,28.35 39.6,25.4 IC1.4
DCAN1_TX
  Top 0.1: AM3352-SOM-EVB-PLATFORM.4-14 20.35,2.45 20.35,3.75 22.35,5.75 22.35,7.45 23.8,8.9 30.6,8.9 37,15.3 37,16.4 38.95,18.35 38.95,23.05 40,24.1 40.8,24.1 IC1.5 40.85,24.15 41.65,24.15 42.5,25 42.5,29.6 42.4,29.7 41.9,29.7 40.35,31.25 38.3,31.25 34.95,34.6 33.95,34.6 U2.1
DVDD  (via drill 0.1)
  Top 0.1: C36.2 26.8,16.8 26.8,15.6 C38.2 26.8,15.55 v26.8,14.45 | v27.7,23.2 28.15,23.65 28.15,24.1 C44.2 | v25.6,20.75 25.6,19.8 24.85,19.05 24.85,16.1 v23.7,14.95
  Bottom 0.1: 23.68,14.93 24.15,14.45 v26.8,14.45 28.45,14.45 29.2,13.7 U4.5 | 23.68,14.93 23.2,15.4 23.2,15.7 TLV320AIC3107.33 | v27.7,23.2 27.7,22.15 27.1,21.55 26.4,21.55 v25.6,20.75 | v23.7,14.95 23.68,14.93
EXT_WAKEUP  (via drill 0.1)
  Top 0.1: v47.65,3.05 48.25,2.45 AM3352-SOM-EVB-PLATFORM.3-20
  Bottom 0.1: v47.65,3.05 47.15,3.55 45.1,3.55 R54.1
GND  (via drill 0.1)
  Top 0.1: R3.1 12.95,36.5 12.95,34.65 C2.2 12.9,34.6 12.9,33.9 | 12.93,30.82 13,30.9 13.7,30.9 14.25,30.35 14.25,30.15 U3.2 | 12.93,30.82 12.7,30.6 11.15,30.6 C10.2 | 12.9,33.2 12.9,30.85 12.93,30.82 | 12.9,33.2 12.9,33.9 | IC4.5 23.45,35.75 22.25,35.75 IC4.6 22.2,35.75 21,35.75 IC4.7 20.95,35.75 19.7,35.75 IC4.8 19.65,35.7 19.65,33.1 | 19.65,33.1 19.65,31.15 | 19.65,31.15 19.65,30.55 17.7,28.6 R21.1 | 12.9,33.9 16.05,33.9 16.85,33.1 19.65,33.1 | 8.12,23.77 6.6,22.25 L6.1 | 8.12,23.77 8.15,23.8 8.15,26 C4.2 8.15,26.05 7.5,26.7 7.5,27.85 7,28.35 7,29.65 | 7,29.65 7,30.4 U1.2 7.15,30.6 7.15,31.9 | 7.15,31.9 v7.15,32.6 | R4.1 3.85,37.05 L3.1 1.6,37.05 C6.2 1.6,37 1.6,36.65 0.85,35.9 0.85,33.1 1.6,32.35 C63.2 | C3.2 1.65,23.85 1.65,29.25 0.9,30 0.9,31.6 1.55,32.25 C63.2 | C63.2 1.6,32.3 2.85,32.3 C64.2 2.9,32.25 3.25,31.9 7.15,31.9 | 12.9,33.2 10.2,33.2 8.6,31.6 8.6,30 8.25,29.65 7,29.65 | USB_HOST.4 5.25,11.7 4.55,11 4.55,5.75 3.8,5 3.8,2.45 AM3352-SOM-EVB-PLATFORM.4-40 3.85,2.4 3.85,2.15 4.85,1.15 14.2,1.15 14.5,1.45 14.5,3.15 15.75,4.4 15.75,7.45 15.25,7.95 v15.25,8.3 | v8.55,23.75 8.15,23.75 8.12,23.77 | C29.2 38.1,24.4 v37.25,24.4 36.25,24.4 36.2,24.45 C30.2 | C30.2 36.15,24.45 35.75,24.45 32.1,20.8 32.1,20.55 30.75,19.2 30.45,19.2 29.9,18.65 29.9,18.35 30.15,18.1 C37.1 30.2,17 32.55,14.65 v32.7,14.65 | C9.1 32.85,28.55 32.85,27.3 35.7,24.45 C30.2 | 37.3,20.6 36.25,20.6 36.2,20.65 C12.2 | 37.3,20.6 38.1,20.6 C13.2 | v37.3,20.55 37.3,20.6 | C32.2 42.5,13.05 42.5,13.95 42.05,14.4 42.05,16.1 40.85,17.3 40.85,17.75 IC2.1 40.85,17.8 40.85,19.05 | 40.85,19.05 41.65,19.05 42.5,19.9 42.5,20.75 41.7,21.55 40.85,21.55 IC1.7
  Top 0.1: 40.85,19.05 IC1.9 | 39.15,28.6 40.2,28.6 40.8,29.2 IC2.10 40.55,28.9 v40.85,28.6 | 39.15,28.6 37.75,28.6 C1.2 37.75,28.65 37.75,29.85 34.3,33.3 33.95,33.3 U2.2 33.9,33.3 30.25,33.3 24.25,27.3 24.25,26.85 24.23,26.82 | 39.15,28.6 39.15,27.55 40,26.7 40.8,26.7 IC1.3 | R5.2 39.3,37.15 40.8,37.15 40.95,37.3 41.6,37.3 42.5,36.4 42.5,34 C31.2 | 26.5,22.9 26.5,24.1 C44.1 26.45,24.15 24.8,25.8 24.8,26.5 IC4.13 24.75,26.55 24.5,26.55 24.23,26.82 | 26.5,22.9 26.5,22.25 C43.1 | v22,22.5 21.45,22.5 21.2,22.25 C41.2 21.35,22.45 20.43,23.38 | v19.7,23.35 20.4,23.35 20.43,23.38 | 20.43,23.38 21.15,24.1 C39.2 21.2,24.15 21.2,26.55 | IC4.9 19.7,26.55 20.95,26.55 IC4.10 | IC4.12 23.45,26.55 22.25,26.55 IC4.11 22.2,26.55 21.2,26.55 | 21.2,26.55 21,26.55 IC4.10 | 21.2,26.55 IC4.10 | 24.23,26.82 24.2,26.85 23.8,26.85 23.5,26.55 IC4.12 | v20.35,15 22.55,15 24.65,17.1 24.65,22.2 C42.2 24.7,22.25 24.7,23.35 | 24.7,23.35 24.7,24.1 C40.2 24.65,24.15 23.5,25.3 23.5,26.5 IC4.12 | 24.7,23.35 v25.05,23.35 | C57.1 26.35,18.5 v25.65,17.8 25.7,17.8 v25.7,16.1 | R85.2 18.65,9.8 19.15,9.8 19.65,9.3 20,9.3 20.6,9.9 R84.2 | C36.1 28.5,16.8 28.5,15.6 C38.1 28.45,15.55 28.45,14.05 25.7,11.3 C7.1 25.7,11.25 24.45,11.25 C55.2 24.4,11.25 23.2,11.25 C54.2 23.15,11.25 21.95,11.25 C53.2 R84.2 | v27.65,16.85 28.45,16.85 C36.1 | 26.5,22.9 28.75,22.9 28.95,22.7 28.95,17.3 28.5,16.85 C36.1 | OOBDPICAN.5 61.55,12.05 60.75,11.25 60.75,5.25 59.65,4.15 59.65,2.5 AM3352-SOM-EVB-PLATFORM.3-2 59.65,2.45 58.45,2.45 AM3352-SOM-EVB-PLATFORM.3-4 58.45,2.5 58.45,2.6 57.15,3.9 46.5,3.9 46.1,3.5 v42.45,3.5
  Top 0.1: AM3352-SOM-EVB-PLATFORM.4-2 27.9,2.45 26.7,2.45 AM3352-SOM-EVB-PLATFORM.4-4 26.7,2.5 26.7,4.7 v26.65,4.75 | v21.45,10.1 21.15,10.4 R84.2 | v20.05,31.15 19.65,31.15
  Bottom 0.1: v7.15,32.6 7.15,32.1 USB_OTG.GND | R24.1 14.25,25.85 12.4,25.85 R19.1 12.35,25.85 10.5,25.85 C8.2 10.45,25.8 10.45,23.3 9.7,22.55 C51.- | C51.- 9.7,22.5 11.1,21.1 11.1,20.3 D4.A 11.1,20.25 9.5,18.65 8.3,18.65 C52.2 8.25,18.6 7.45,18.6 6,17.15 4.1,17.15 3.6,16.65 3.6,13.4 USB_HOST.4 5.25,9.65 3.2,7.6 2.8,7.6 1.55,6.35 1.05,6.35 | PWR_LED.C 1.05,1.3 1.05,3.8 LED3.C 1.05,3.85 1.05,6.35 | v15.25,8.3 14.7,8.85 U10.4 | 1.05,6.35 LED2.C | v8.55,23.75 9.7,22.6 C51.- | v32.7,14.65 35.3,14.65 R41.2 | C13.2 40.6,20.55 40.8,20.35 IC2.3 | C14.2 36.2,18.7 38.1,20.6 C13.2 | v37.3,20.55 37.65,20.2 C13.2 | C14.2 36.55,19 37.75,17.8 40.8,17.8 IC2.1 40.8,17.75 40.8,16.85 40.75,16.8 40.75,16.5 40.9,16.35 41.6,16.35 42.2,15.75 42.2,13.35 42.5,13.05 C32.2 | 38.1,24.4 v37.25,24.4 36.25,24.4 36.2,24.45 C30.2 | 38.1,24.4 39,24.4 40,25.4 IC2.7 41.65,25.4 42.5,26.25 42.5,27.1 41.65,27.95 40.9,27.95 IC2.9 40.85,27.95 v40.85,28.6 40.85,29.2 IC2.10 40.85,29.25 42.05,30.45 42.05,31.55 42.5,32 42.5,33.95 C31.2 | 38.1,24.4 C29.2 | C14.2 36.3,18.85 35,20.15 35,23.45 36,24.45 36.15,24.45 C30.2 | C30.2 35.85,24.35 31.7,28.5 30.65,28.5 28.05,31.1 24.15,31.1 BAT2.GND 24.1,31.15 v20.05,31.15 | v22,22.5 22.15,22.35 22.15,21.8 TLV320AIC3107.16 | v19.7,23.35 19.6,23.45 18.85,23.45 C16.2 | v20.35,15 20.2,15.15 20.2,15.7 TLV320AIC3107.39 | v25.05,23.35 25.15,23.45 25.9,23.45 C17.2 | TLV320AIC3107.24 24.9,19.45 24.65,19.45 24.3,19.1 24.3,18.85 24.65,18.5 24.9,18.5 TLV320AIC3107.26 24.95,18.45 25.25,18.45 25.65,18.05 v25.65,17.8 | 27.68,16.88 28.55,16 R14.1 28.4,16.1 27.6,15.3 26.4,15.3 25.7,16 v25.7,16.1
  Bottom 0.1: 27.68,16.88 27,17.55 27,17.65 R12.2 | v27.65,16.85 27.68,16.88 | OOBD2-CONNECTOR.3 59.1,17.75 59.1,16.5 60.65,14.95 60.65,13 61.55,12.1 OOBDPICAN.5 | C5.1 19.2,10.1 v21.45,10.1 24.6,10.1 25.7,11.2 C7.1 25.75,11.2 27.15,9.8 | 37.42,2.98 37.4,3 37.4,4.55 38.1,5.25 R55.2 | 37.42,2.98 37.5,2.9 39.2,2.9 39.85,3.55 41.25,3.55 C48.2 41.25,3.5 v42.45,3.5 | 27.15,9.8 28.25,10.9 28.25,11.05 U4.2 28.3,11.1 28.3,12.1 28.5,12.3 C47.2 31.15,12.35 32.05,11.45 32.05,11.05 32.35,10.75 36.8,10.75 37.45,11.4 38.75,11.4 U6.2 | 27.15,9.8 27.1,9.75 27.1,9.55 C35.1 | 26.65,5.05 26.65,9.1 27.05,9.5 C35.1 | 26.65,5.05 v26.65,4.75 | 26.65,5.05 27.55,5.05 29.7,2.9 34.9,2.9 34.95,2.95 37.4,2.95 37.42,2.98 | 27.15,9.8 C35.1
GND1  (via drill 0.1)
  Top 0.1: v24.5,14.75 23.8,14.05 21.75,14.05 21.15,13.45 16.7,13.45 14.55,11.3 14.55,11.15 C46.1 | v25.1,15.05 26.05,16 26.05,17.4 26.45,17.8 27.55,17.8 28.25,18.5 C45.1
  Bottom 0.1: v24.5,14.75 24.8,14.75 v25.1,15.05
GNDA  (via drill 0.1)
  Top 0.1: v51.3,29.8 51.85,29.25 IC2.11 | v52.7,35.7 D2.3 54.45,36.5 55.95,36.5 C33.2 56,36.55 56.65,37.2 58.3,37.2 58.4,37.1 58.4,36.4 59.05,35.75 C34.2 59.1,35.3 59.1,33.8 59.85,33.05 D1.3 59.85,33 59.85,32.2 57.95,30.3 57.95,28.4 60,26.35 60,17.4 58.8,16.2 v57.95,16.2 | 53.9,25.15 53.7,25.15 52.7,24.15 51.9,24.15 IC1.16 52.75,24.15 53.95,22.95 53.95,21.1 53.98,21.07 | 53.9,25.15 C21.2 | 56.58,21.12 57.35,20.35 R25.1 57.4,20.3 57.4,18.95 57.5,18.85 57.5,17.3 56.45,16.25 C20.2 56.5,16.15 56.4,16.25 54.65,16.25 C15.2 54.6,16.3 53.7,16.3 52.25,17.75 51.9,17.75 IC1.11 51.9,17.7 51.9,17.1 50.35,15.55 50.35,13.2 50.2,13.05 C32.1 | 56.58,21.12 56.55,21.15 56.55,25 C22.2 | 53.98,21.07 54,21.1 55.7,21.1 | 53.98,21.07 53.25,20.35 51.9,20.35 IC1.13 | 55.7,21.1 56.55,21.1 56.58,21.12 | 55.7,21.1 v55.7,21.15 | 53.9,25.15 v53.9,25.9
  Bottom 0.1: IC2.11 51.85,29.25 v51.3,29.8 50.65,30.45 50.65,31.75 50.2,32.2 50.2,33.95 C31.1 50.25,33.95 52,35.7 v52.7,35.7 | 53.83,25.82 53,26.65 51.9,26.65 IC2.13 | 53.83,25.82 54.45,25.2 54.6,25.2 C21.2 | R26.1 55.7,20.35 v55.7,21.15 55.7,24.2 56.5,25 C22.2 | v53.9,25.9 53.83,25.82 | 51.67,14.18 50.55,13.05 50.2,13.05 C32.1 | 51.67,14.18 53.75,16.25 54.6,16.25 C15.2 54.65,16.25 56.4,16.25 56.5,16.15 C20.2 56.5,16.2 v57.95,16.2 | 51.67,14.18 50.65,15.2 50.65,15.85 51.85,17.05 51.85,17.75 IC1.11 51.8,17.75 51.1,17.75 50.2,18.65 50.2,20.7 50.35,20.85 53.25,20.85 53.6,21.2 53.6,21.95 52.7,22.85 51.9,22.85 IC2.16
HS-CAN_RS  (via drill 0.1)
  Top 0.1: v34.85,37.1 35.75,37.1 R7.2 | v24.2,35.4 24.2,33.8 17.8,27.4 17.1,27.4 16.8,27.1 16.8,22.55 15.3,21.05 v14.2,21.05 | v9.5,13.25 7.95,11.7 7.95,7.65 8.35,7.25 8.35,5.55 9.1,4.8 10.55,4.8 12.7,2.65 AM3352-SOM-EVB-PLATFORM.4-26
  Bottom 0.1: v34.85,37.1 25.9,37.1 v24.2,35.4 | v14.2,21.05 14.2,20.8 10.4,17 9.9,17 9.5,16.6 v9.5,13.25
I2C0-SCL  (via drill 0.1)
  Top 0.1: v28.6,24.9 28.6,26.5 IC4.16 | AM3352-SOM-EVB-PLATFORM.4-15 19.05,7.15 v19.55,7.65 | v22.1,7.65 22.25,7.65 24.5,9.9 27,9.9 28.9,11.8 28.9,12.1 v28.4,12.6 | v22.5,14.35 20.35,14.35 v18.65,16.05
  Bottom 0.1: 18.65,16.5 17.35,16.5 17.05,16.8 R8.1 17,16.85 17,17.15 16.35,17.8 16.35,21.85 16.9,22.4 19.75,22.4 20.15,22.8 26.5,22.8 v28.6,24.9 | 18.65,16.5 18.85,16.5 TLV320AIC3107.1 18.65,16.5 | v22.1,7.65 v19.55,7.65 | v28.4,12.6 27.3,12.6 25.65,14.25 22.6,14.25 v22.5,14.35 | 18.65,16.5 v18.65,16.05
I2C0-SDA  (via drill 0.1)
  Top 0.1: AM3352-SOM-EVB-PLATFORM.4-16 19.05,3.45 17.25,5.25 17.25,8.05 v18.2,9 | v17.15,14.4 17.95,15.2 v17.95,16.85 | v25.35,26.4 25.35,25.55 25.65,25.25 26.4,25.25 27.3,26.15 27.3,26.5 IC4.15 | v19.1,26.75 19.1,26.25 18.35,25.5 18.35,20.8 v18.15,20.6
  Bottom 0.1: 18.27,17.18 R9.1 17.05,18.45 18.15,19.55 v18.15,20.6 | 18.27,17.18 18.45,17 18.85,17 TLV320AIC3107.2 | v18.2,9 18.2,9.55 17.15,10.6 v17.15,14.4 | 18.27,17.18 v17.95,16.85 | v25.35,26.4 24.35,26.4 24.2,26.25 19.6,26.25 v19.1,26.75
LED1  (via drill 0.1)
  Top 0.1: v9.45,5.4 14.4,5.4 15.2,6.2 15.2,6.45 AM3352-SOM-EVB-PLATFORM.4-21
  Bottom 0.1: v9.45,5.4 8.5,4.45 R48.1
LED2  (via drill 0.1)
  Top 0.1: v9.15,7.75 12.9,7.75 13.95,6.7 13.95,6.5 AM3352-SOM-EVB-PLATFORM.4-23
  Bottom 0.1: v9.15,7.75 8.5,7.1 8.5,7 R49.1
MS-CAN_RS  (via drill 0.1)
  Top 0.1: v33.9,14.95 33.9,13.4 v29.7,9.2 | v28.7,8.1 25.55,8.1 24.65,7.2 24.65,5.5 v22.75,3.6 | v13.3,5.85 12.7,6.45 AM3352-SOM-EVB-PLATFORM.4-25
  Bottom 0.1: v33.9,14.95 34.25,14.95 36.1,16.8 36.6,16.8 R40.2 | v29.7,9.2 29.7,9.1 v28.7,8.1 | v22.75,3.6 17.3,3.6 17,3.3 15.85,3.3 v13.3,5.85
N$1
  Bottom 0.1: LED2.A 6.15,6.35 6.75,6.95 R49.2
N$2
  Top 0.1: R32.1 57.7,33.35 57.7,34.9 R31.1 57.7,34.95 57.7,36.5 C33.1
N$3  (via drill 0.1)
  Top 0.1: v13.3,27.55 13.3,27.7 15.2,29.6 15.2,30.1 U3.3
  Bottom 0.1: v13.3,27.55 12.4,27.55 R19.2
N$4
  Bottom 0.1: U10.8 9.15,12.7 8.75,13.1 8.75,14.2 8.3,14.65 8.3,16.9 C52.1
N$5
  Top 0.1: 37.1,36.65 37.55,37.1 R5.1 37.1,36.65 | 37.1,36.65 36.85,36.4 35.1,36.4 34.4,37.1 34.1,37.1 R7.1 | 37.1,36.65 39.1,34.65 U2.8
N$6
  Bottom 0.1: R69.2 15.45,15.2 15.15,15.2 11.4,11.45 9.5,11.45 U10.7
N$7  (via drill 0.1)
  Top 0.1: v9.7,12.15 8.7,11.15 C49.1 | v14.05,13.3 v12.8,13.3
  Bottom 0.1: v9.7,12.15 11.65,12.15 v12.8,13.3 | v14.05,13.3 U10.1
N$8  (via drill 0.1)
  Top 0.1: v11.3,10.2 10.4,11.1 C49.2 10.35,11.15 v10.35,13.6 | v10.35,14.5 10.35,16.7 9.3,17.75 L11.1
  Bottom 0.1: v11.3,10.2 14.65,10.2 U10.3 | v10.35,14.5 v10.35,13.6
N$9  (via drill 0.1)
  Top 0.1: v16.05,9.9 16.05,11.5 16.9,12.35 C50.1
  Bottom 0.1: v16.05,9.9 15.85,9.7 9.95,9.7 9.5,10.15 U10.6
N$10
  Top 0.1: C34.1 59.1,37.05 60.6,37.05 R33.1 62.2,37.05 R6.1
N$11
  Top 0.1: R84.1 20.6,11.65 19.4,11.65 18.65,12.4 C50.2
N$12  (via drill 0.1)
  Top 0.1: v30.15,13.5 30.15,15.3 C37.2
  Bottom 0.1: v30.15,13.5 29.55,12.9 28.1,12.9 27.35,13.65 U4.4
N$13  (via drill 0.1)
  Top 0.1: U3.1 13.3,30.1 13.05,29.85 v12.8,29.85 10.55,29.85 10.45,29.95 10.45,31.6 11.1,32.25 C10.1 11.1,32.3 10.5,32.9 v10.35,32.9 | v15.95,25.85 15.95,24.8 R22.2 | v5.5,30.1 5.5,25.65 6.55,24.6 6.55,23.85 L5.1
  Bottom 0.1: C8.1 10.5,27.55 v12.8,29.85 12.8,29.8 13.3,29.8 15.95,27.15 v15.95,25.85 | v5.5,30.1 5.5,32.05 6.35,32.9 v10.35,32.9
N$14  (via drill 0.1)
  Top 0.1: v33.1,17.65 31.05,17.65 v30.2,18.5
  Bottom 0.1: R14.2 28.6,17.7 30.15,17.7 C19.2 30.2,17.7 v30.2,18.5 | v33.1,17.65 33.1,16.85 L4.2
N$15
  Bottom 0.1: C18.1 31.75,22.2 33,23.45 SPEAKER.2 33,23.5 32.6,23.9 R13.2
N$16
  Bottom 0.1: L4.1 34.8,16.85 34.4,16.85 33.3,17.95 32.95,17.95 32.4,17.4 32.4,17.05 32.3,16.95 31.2,16.95 30.85,17.3 30.85,18.3 29.95,19.2 29.85,19.2 29.2,19.85 29.2,22.2 30.45,23.45 SPEAKER.1
N$18
  Bottom 0.1: TLV320AIC3107.23 24.95,20 26.1,20 26.95,20.85 R11.2 27,20.9 28,21.9 28,23.7 30,25.7 30.9,25.7 R13.1
N$19
  Bottom 0.1: TLV320AIC3107.28 24.95,17.5 25.8,17.5 26.25,17.95 26.25,18.45 26.95,19.15 R11.1
N$20
  Bottom 0.1: TLV320AIC3107.29 24.95,16.95 26,16.95 26.95,16 R12.1
N$21  (via drill 0.1)
  Top 0.1: v17.85,14.65 16.85,13.65 15.6,13.65 v14.1,12.15 | C46.2 12.85,11.15 13.3,11.6 v13.3,11.9 12.15,13.05 12.15,25.9 10.15,27.9 v10.15,31.55 | v28.3,21.45 28.3,20.25 C45.2 | v30.15,25.4 30.15,27.85 32.15,29.85 32.15,32.4 v31.55,33
  Bottom 0.1: v17.85,14.65 18.3,14.65 19.35,15.7 TLV320AIC3107.40 | v14.1,12.15 13.55,12.15 v13.3,11.9 | v28.3,21.45 28.3,23.55 v30.15,25.4 | v31.55,33 30.1,33 28,35.1 15.15,35.1 12.95,32.9 11.5,32.9 v10.15,31.55
N$22
  Bottom 0.1: TLV320AIC3107.38 20.65,14.2 19.4,12.95 R17.2
N$23
  Bottom 0.1: TLV320AIC3107.37 21.15,13.45 20.65,12.95 R16.2
N$24
  Bottom 0.1: TLV320AIC3107.35 22.2,15.7 22.2,13.9 23.15,12.95 R15.2
N$25
  Bottom 0.1: TLV320AIC3107.36 21.7,15.7 21.7,13.15 21.9,12.95 R10.2
N$26
  Bottom 0.1: TLV320AIC3107.34 22.65,15.75 22.65,16 22.15,16.5 19.75,16.5 19.55,16.7 19.55,21.1 19.3,21.35 17.15,21.35 R18.2
N$27
  Top 0.1: R20.1 17.5,33.8 17.5,34.2 19.2,35.9 19.2,36.85 19.35,37 25.1,37 26,36.1 26,35.75 IC4.3
N$28
  Top 0.1: 4.2,23.85 4.85,23.85 L5.2 | 4.2,23.85 3.45,23.85 C3.1 | 4.2,23.85 4.2,19.8 USB_HOST.1
N$29
  Top 0.1: L6.2 4.9,22.25 4.9,22.55 5.55,23.2 5.55,24.4 5.4,24.55 2.85,24.55 2.55,24.25 2.55,21.35 USB_HOST.P$1 3.35,20.5 3.35,12.65 2.55,11.85 2.55,9.2 USB_HOST.P$2
N$30
  Top 0.1: R32.2 56,33.3 56,31.6 56.15,31.45 HS-CAN.1
N$31  (via drill 0.1)
  Top 0.1: C24.1 56.5,18.1 56.45,18.05 54.65,18.05 C23.1 54.6,18.05 53.75,18.05 | 53.75,18.05 53.7,18.05 52.7,19.05 IC1.12 | C26.1 56.5,27 56.45,26.95 54.65,26.95 C25.1 54.6,26.95 54.6,27.25 53.95,27.9 53.5,27.9 | 53.5,27.9 51.9,27.9 IC1.19 | v53.75,16.7 53.75,18.05 | v55.25,14.3 v53.3,16.25 | v60.15,15 60.15,15.85 v60.2,15.9 | v55.05,29.45 54.9,29.45 54.6,29.75 v54.4,29.75 | v53.7,29.05 53.7,28.6 53.5,28.4 53.5,27.9
  Bottom 0.1: v53.3,16.25 v53.75,16.7 | v55.25,14.3 59.45,14.3 v60.15,15 | v60.2,15.9 60.2,25.55 56.3,29.45 v55.05,29.45 | v53.7,29.05 v54.4,29.75
N$32
  Top 0.1: R33.2 60.65,35.3 60.65,33.65 60.75,33.55 60.75,31.5 59.1,29.85 MS-CAN.1
N$33  (via drill 0.1)
  Top 0.1: v53.7,20.35 55.65,20.35 R25.2
  Bottom 0.1: v53.7,20.35 51.9,20.35 IC2.18
N$40
  Bottom 0.1: U6.7 33.6,11.45 35.9,11.45 40,15.55 41.25,15.55 R27.2
N$41
  Top 0.1: U2.6 39.15,32.05 40.65,32.05 41.25,31.45 R30.2
N$42
  Bottom 0.1: U6.6 33.6,10.2 37.2,10.2 37.65,10.65 41.1,10.65 41.25,10.5 R28.2
N$43  (via drill 0.1)
  Top 0.1: v31.55,11.5 31.55,11.65 29.5,13.7 29.5,19.5 30.3,20.3 WAKE-UP.1
  Bottom 0.1: v31.55,11.5 31.85,11.2 31.85,9 34.25,6.6 34.25,5.3 R47.1
N$44  (via drill 0.1)
  Top 0.1: v37.65,15.95 37.65,10.9 40.15,8.4 v40.3,8.4
  Bottom 0.1: R55.1 39.6,3.6 41.25,5.25 C48.1 | R54.2 45.05,5.3 41.3,5.3 C48.1 | v37.65,15.95 37.65,17.4 37.3,17.75 35.45,17.75 33.2,20 33.2,20.3 WAKE-UP.2 | v40.3,8.4 40.3,6.35 41.3,5.35 C48.1
N$45
  Top 0.1: U2.7 39.15,33.35 39.5,33.35 41.25,35.1 41.25,36.5 R29.1
N$50  (via drill 0.1)
  Top 0.1: v55,19.05 v53.9,19.05
  Bottom 0.1: 55,18.05 56.45,18.05 56.5,18.1 C20.1 | 55,18.05 54.65,18.05 C15.1 55,18.05 | 55.3,26.95 56.45,26.95 56.5,27 C22.1 | 55.3,26.95 54.65,26.95 C21.1 54.6,26.95 54,26.95 53.05,27.9 51.9,27.9 IC2.12 | 55,18.05 v55,19.05 55,24.25 55.3,24.55 55.3,26.95 | v53.9,19.05 IC2.19
N$52  (via drill 0.1)
  Top 0.1: v54.6,23.1 v56,21.7 | v52.5,26.05 51.9,26.65 IC1.18
  Bottom 0.1: v56,21.7 57.35,20.35 R26.2 | v54.6,23.1 54.6,23.85 53.6,24.85 53.6,25.75 53.3,26.05 v52.5,26.05
N$62  (via drill 0.1)
  Top 0.1: R70.1 16.95,11.1 16.95,9.85 R85.1 16.9,9.8 v16.05,8.95
  Bottom 0.1: v16.05,8.95 16.05,8.65 15.35,7.95 14.05,7.95 9.15,3.05 9.15,1.3 9.05,1.2 7.9,1.2 7.8,1.3 7.8,5.05 9.45,6.7 9.45,8.85 U10.5
N$80
  Bottom 0.1: R40.1 38.3,16.8 38.3,16.15 37.05,14.9 37.05,14.65 R41.1 37,14.6 35.1,12.7 U6.8
N$99
  Top 0.1: R3.2 11.2,35.9 8.4,33.1 8.4,30.9 U1.3
N$100
  Top 0.1: 2.9,30.4 2.9,30.55 C64.1 | 2.9,30.4 2.9,29.15 R1.2 | C63.1 1.6,30.6 2.85,30.6 C64.1 | L1.2 6.45,27.65 6.45,30 6.05,30.4 U1.1 6,30.4 2.9,30.4 | 2.9,30.4 C64.1
N$129
  Bottom 0.1: PWR_LED.A 2.8,1.3 6.15,1.3 6.75,1.9 R86.2
N$231
  Bottom 0.1: LED3.A 6.15,3.8 6.75,4.4 R48.2
N$266  (via drill 0.1)
  Top 0.1: v2.8,36.75 3.8,35.75 L3.2
  Bottom 0.1: USB_OTG.GND2 6.75,25.55 2.55,25.55 USB_OTG.GND1 2.55,25.6 2.55,35.4 USB_OTG.GND3 | v2.8,36.75 2.8,35.7 2.55,35.45 USB_OTG.GND3 | USB_OTG.GND4 6.75,35.45 3,35.45 2.8,35.65 USB_OTG.GND3
SYS_RESETN  (via drill 0.1)
  Top 0.1: v22.9,16.4 19.85,16.4 18.75,17.5 v18.75,25.45 | v18.5,26.45 18.5,27.8 24.75,34.05 24.75,35.7 IC4.4 | v7.1,8.05 7.1,5.5 8,4.6 9.45,4.6 11.4,2.65 11.4,2.45 AM3352-SOM-EVB-PLATFORM.4-28 | v8,14.2 11.35,14.2 11.85,14.7 v11.85,22.35
  Bottom 0.1: v22.9,16.4 23.75,16.4 24.15,16 24.15,15.75 TLV320AIC3107.31 | v18.5,26.45 18.75,26.2 v18.75,25.45 18.45,25.15 14.65,25.15 v11.85,22.35 | v7.1,8.05 7.1,13.3 v8,14.2
USB0_CE  (via drill 0.1)
  Top 0.1: v16.8,34.55 13.9,37.45 10.3,37.45 9.9,37.05 R2.2 | v24.05,26.55 24.05,25.6 24.85,24.8 25.3,24.8 25.75,24.35 25.75,21.65 26.45,20.95 26.9,20.95 27.6,20.25 27.6,19.55 v27.8,19.35 | v49.1,3.6 51.1,3.6 52.05,2.65 52.05,2.45 AM3352-SOM-EVB-PLATFORM.3-14
  Bottom 0.1: v16.8,34.55 19.75,31.6 19.75,27.65 20.85,26.55 v24.05,26.55 | v27.8,19.35 27.8,17.15 28.25,16.7 32.3,16.7 32.4,16.6 32.4,13.15 32.3,13.05 32.3,11.1 32.45,10.95 36.7,10.95 37.65,11.9 40.95,11.9 42.3,10.55 42.3,10.4 v49.1,3.6
USB0_DM  (via drill 0.1)
  Top 0.1: AM3352-SOM-EVB-PLATFORM.3-15 50.8,6.25 49.95,5.4 v39.9,5.4 | v35.3,4.75 27.85,4.75 27.55,5.05 25.9,5.05 v25.35,4.5 | v14.2,7.65 13.3,7.65 10.5,10.45 9.75,10.45 9.65,10.55 9.65,11.65 10,12 10,13.2 9.5,13.7 7.75,13.7 7,14.45 v7,18.6
  Bottom 0.1: v39.9,5.4 39.3,5.4 38.75,5.95 36.5,5.95 v35.3,4.75 | v25.35,4.5 19.8,4.5 16.95,7.35 14.5,7.35 v14.2,7.65 | v7,18.6 7,22.7 8.7,24.4 8.7,28.95 8,29.65 7.2,29.65 USB_OTG.D-
USB0_DP  (via drill 0.1)
  Top 0.1: v52.7,6.9 52.3,6.5 52.1,6.5 AM3352-SOM-EVB-PLATFORM.3-13
  Bottom 0.1: v52.7,6.9 57,11.2 61.95,11.2 62.55,11.8 62.55,23.2 61.3,24.45 61.25,24.45 60.6,25.1 60.6,26.75 57.3,30.05 57.3,31.9 51.4,37.8 12.2,37.8 7.5,33.1 6.25,33.1 5.2,32.05 5.2,29.95 5.35,29.8 5.65,29.8 6.3,30.45 7.15,30.45 USB_OTG.D+
USB0_DRV  (via drill 0.1)
  Top 0.1: v6,34.1 6.35,34.45 R4.2 7.05,36.05 7.05,37.65 6.95,37.75 0.95,37.75 0.65,37.45 0.65,4.1 v3.75,1 | 7.28,33.73 7.9,33.1 U1.4 | 7.28,33.73 v6.9,34.1 | 7.28,33.73 8.85,35.3 R2.1 | v50.15,2.4 AM3352-SOM-EVB-PLATFORM.3-16
  Bottom 0.1: v6.9,34.1 v6,34.1 | v50.15,2.4 49.7,2.4 47.7,0.4 4.35,0.4 v3.75,1
USB0_ID  (via drill 0.1)
  Top 0.1: v33,3.5 35.15,1.35 52.5,1.35 53.3,2.15 53.3,2.4 AM3352-SOM-EVB-PLATFORM.3-12 | v31,9.75 31,9.9 34.4,13.3 v34.4,19.5
  Bottom 0.1: v33,3.5 33,5 31,7 v31,9.75 | v34.4,19.5 34.4,25.5 31.6,28.3 29.15,28.3 27.8,26.95 26.35,26.95 25.45,26.05 19.35,26.05 14.15,31.25 7.2,31.25 USB_OTG.ID
USB0_VBUS  (via drill 0.1)
  Top 0.1: v15,7.65 12.1,10.55 12.1,12.3 10.5,13.9 7.85,13.9 7.3,14.45 7.3,18.75 5.9,20.15 5.9,24.4 2.9,27.4 R1.1 | v23.5,6.35 23.5,7.35 24.85,8.7 33.4,8.7 36.25,11.55 36.55,11.55 37.1,11 37.1,10.85 40.4,7.55 52.5,7.55 53.3,6.75 53.3,6.5 AM3352-SOM-EVB-PLATFORM.3-11
  Bottom 0.1: v15,7.65 19.1,7.65 20.4,6.35 v23.5,6.35
USB1_CE  (via drill 0.1)
  Top 0.1: v17.65,13.75 18.25,14.35 18.25,20.05 17,21.3 17,25.35 17.65,26 17.65,26.65 R23.2 | v34.85,1.2 35,1.2 35.05,1.15 54.85,1.15 55.85,2.15 55.85,2.4 AM3352-SOM-EVB-PLATFORM.3-8
  Bottom 0.1: v17.65,13.75 17.4,13.5 17.4,10.65 18.15,9.9 21,9.9 29.7,1.2 v34.85,1.2
USB1_DM
  Top 0.1: AM3352-SOM-EVB-PLATFORM.3-9 54.65,6.5 54.65,7.65 56.5,9.5 OOBDPICAN.2
  Bottom 0.1: USB_HOST.2 5.25,16.2 6.45,16.2 8.3,14.35 8.3,13.15 8.2,13.05 8.2,11.05 8.6,10.65 16.1,10.65 18.5,8.25 22.05,8.25 29.7,0.6 47.6,0.6 56.5,9.5 OOBDPICAN.2
USB1_DP  (via drill 0.1)
  Top 0.1: v56.55,7.15 55.9,6.5 AM3352-SOM-EVB-PLATFORM.3-7 | v28.75,1.1 29.2,1.1 31.9,3.8 46.1,3.8 47,4.7 58.45,4.7 59.15,5.4 60.1,5.4 60.2,5.5 60.2,8.4 59.1,9.5 OOBDPICAN.4
  Bottom 0.1: v56.55,7.15 56.7,7.15 59.05,9.5 OOBDPICAN.4 | USB_HOST.3 5.25,13.8 6.9,12.15 6.9,8.3 6.8,8.2 6.8,7.9 7,7.7 7.35,7.7 7.6,7.45 7.6,1.2 7.8,1 28.65,1 v28.75,1.1
USB1_DRV
  Top 0.1: U3.4 15.25,32.7 15.25,31.25 15.95,30.55 15.95,28.6 R21.2 16,28.55 16,26.7 R23.1 15.95,26.65 15.3,26 15.3,24.8 12.35,21.85 12.35,13.3 13.6,12.05 13.6,10.45 15.95,8.1 15.95,5.55 16.1,5.4 16.3,5.4 18.3,3.4 18.3,1.7 19.2,0.8 29.2,0.8 29.6,1.2 30,1.2 30.3,0.9 55.85,0.9 56.4,1.45 56.4,3.4 56.3,3.5 55.5,3.5 54.65,2.65 54.65,2.45 AM3352-SOM-EVB-PLATFORM.3-10
USB1_ID  (via drill 0.1)
  Top 0.1: v11.45,14.75 v11.45,26.15 | v11.45,12.45 11.45,10.85 14.6,7.7 v14.6,6.3 | v16.85,4.05 17.25,3.65 17.25,1.45 18.3,0.4 55.65,0.4 57.15,1.9 AM3352-SOM-EVB-PLATFORM.3-6
  Bottom 0.1: v11.45,26.15 11.8,26.5 12.7,26.5 13.7,27.5 14.25,27.5 R24.2 | v11.45,12.45 v11.45,14.75 | v16.85,4.05 v14.6,6.3
USB1_VBUS  (via drill 0.1)
  Top 0.1: v35.3,33.8 25.35,33.8 18.8,27.25 18.8,26.3 17.7,25.2 17.7,24.8 R22.1 | v40.7,37.5 42.4,37.5 42.5,37.6 50.15,37.6 50.65,37.1 50.65,34.7 52.05,33.3 52.05,31.9 52.55,31.4 52.55,30.95 54.05,29.45 54.6,29.45 55,29.05 56.5,29.05 57.8,27.75 57.8,21.15 58.05,20.9 58.05,16.75 57.5,16.2 57.5,7.35 57.15,7 AM3352-SOM-EVB-PLATFORM.3-5
  Bottom 0.1: v35.3,33.8 37,33.8 v40.7,37.5
VBAT
  Top 0.1: IC4.14 26.05,26.55 26.05,26.9 30.25,31.1 30.7,31.1 BAT2.VCC@1